# EAGLE board MultiWiiChassisv1.2_hex_power (EAGLE 5.11)
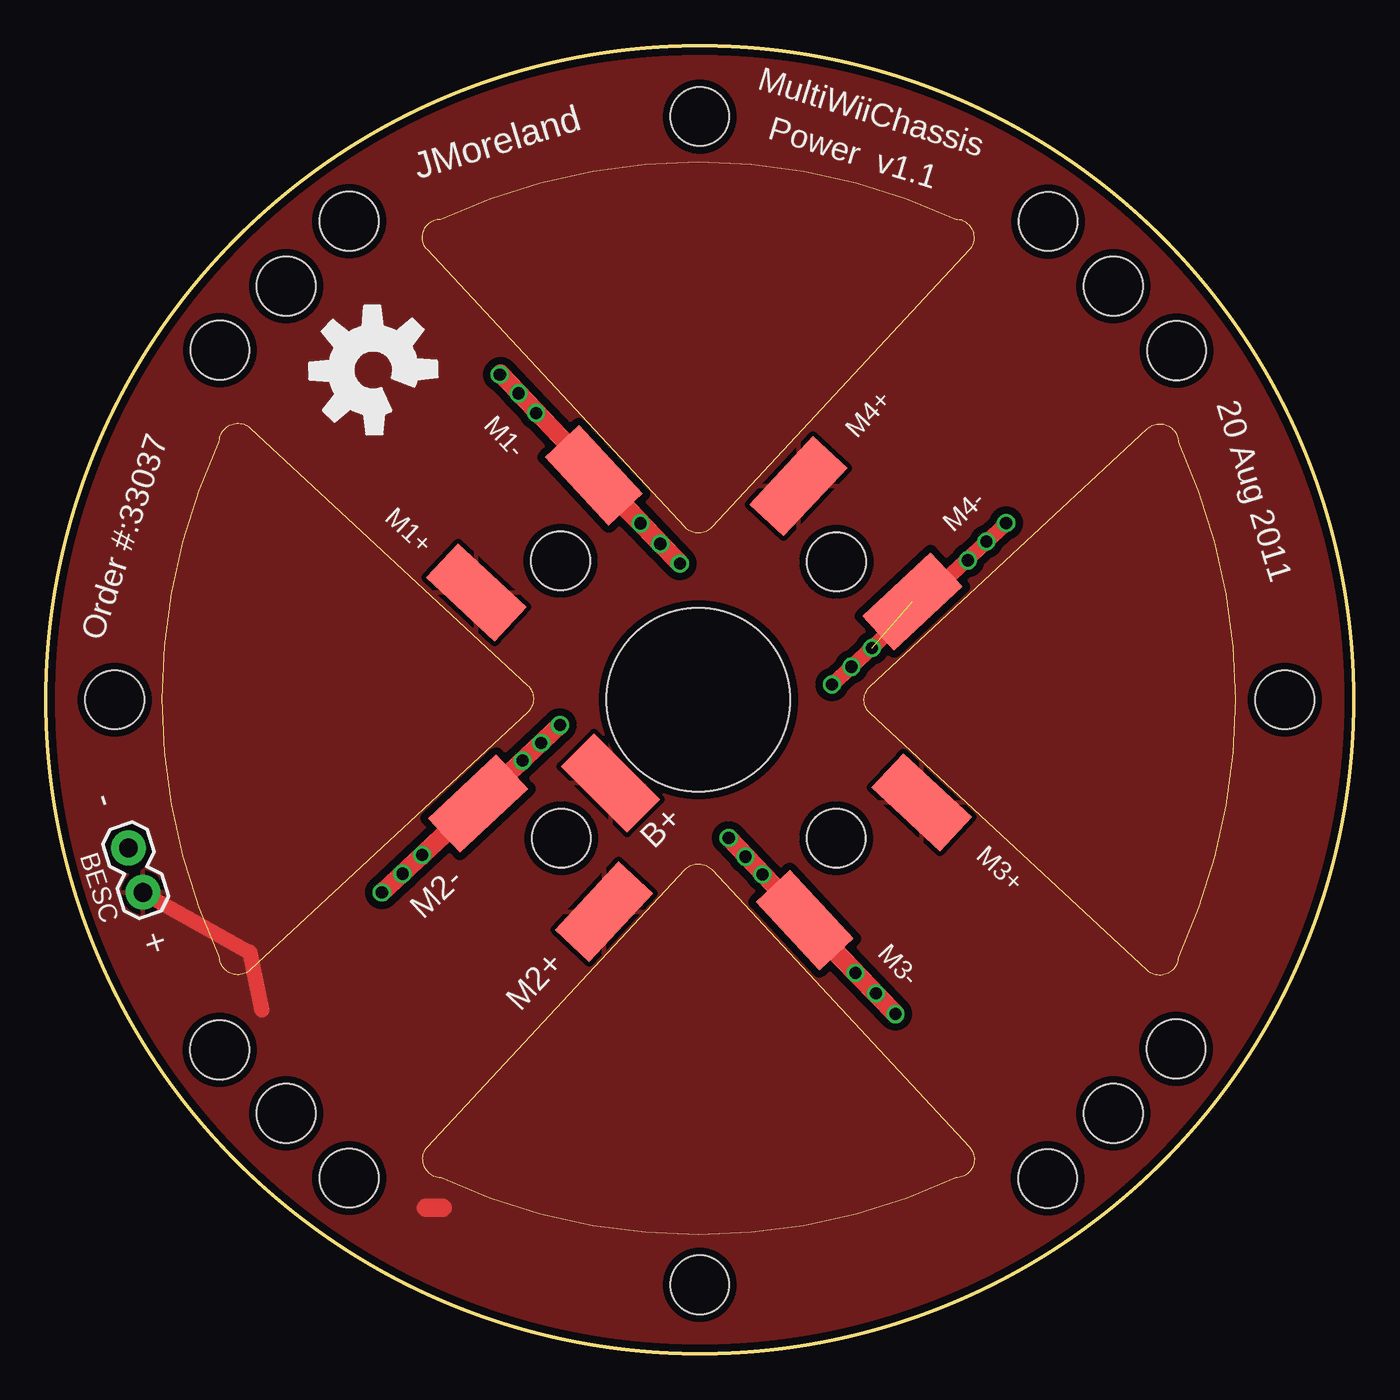
[diagram p0: board, top side]
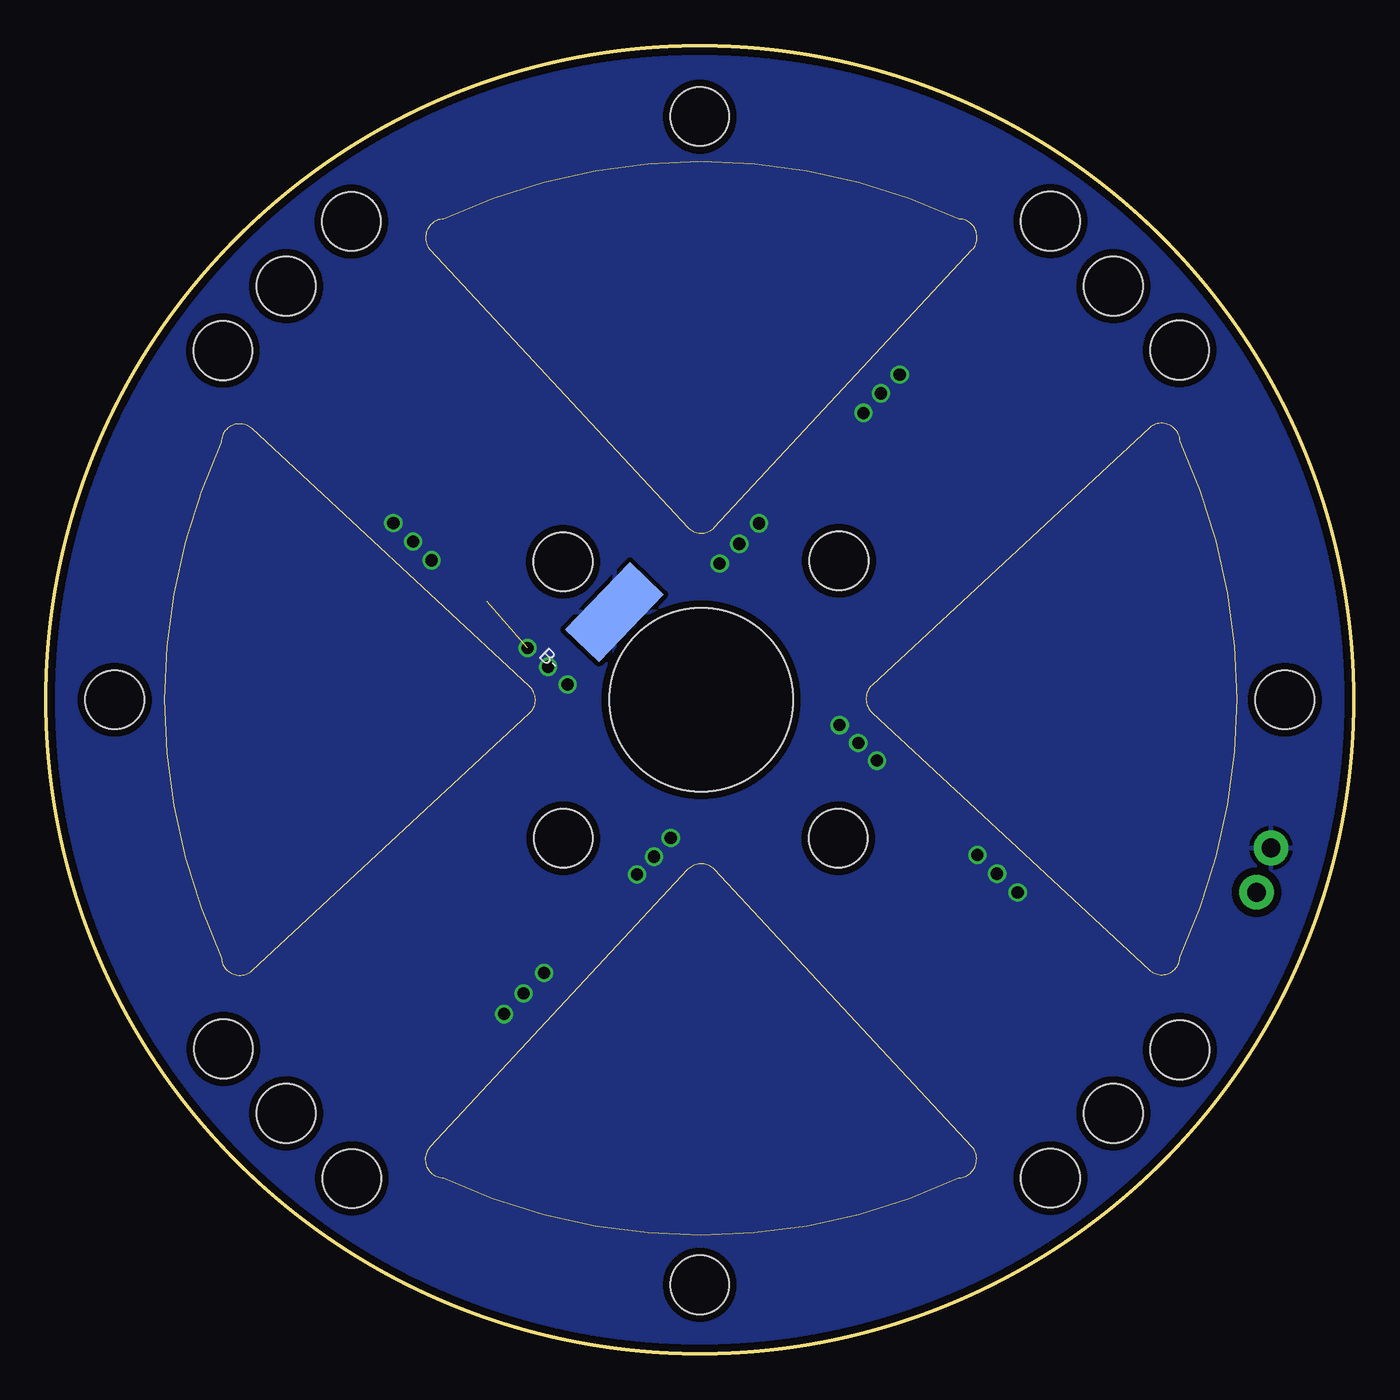
[diagram p1: board, bottom side, seen from below]

Size 71.12 x 71.12 mm. Coordinates in mm from the lower left corner, seen from the top.
Outline: circle at 35.56,35.56 radius 35.56
Copper layers (1*16): Top 0.035mm / dielectric 1.5mm / Bottom 0.035mm
Design rules "Fusion_eagle_rule_v1.1": minimum track width 6mil, minimum drill 12mil, track to track 6mil, track to pad 6mil, pad to pad 6mil, via to via 6mil, smd to smd 0mil, copper to edge 10mil, drill to drill 10mil, minimum pad ring 10mil, minimum via ring 6mil, stop-mask expansion 2mil, vias tented up to drill 100mil, thermal gap 10mil
Holes 3.2 mm at 35.56,67.28 67.38,35.56 35.56,3.74 3.74,35.56 13.06,13.06 13.06,58.06 58.06,58.06 58.06,13.06 9.46,54.58 16.49,61.59 54.5,61.57 61.49,54.55 61.47,16.57 54.48,9.52 16.49,9.55 9.45,16.52 28.03,28.03 27.99,43.12 42.99,43.06 42.98,28.03
Holes 10 mm at 35.48,35.56
vRestrict: 3 lines
Milling: area 20.5,6.5 to 50.5,26.6; area 6.3,20.6 to 26.5,50.6; area 20.5,44.6 to 50.5,64.8; area 44.5,20.6 to 64.7,50.6

## Footprints (pad centres in the part's own frame; a part is rotated, then mirrored left to right if it is on the bottom)
SOLDER_PAD_2X1 = smd 5.08 x 2.54: SPAD 0,0
1X02 = drill 1.016 pad 1.88 round: 1 0,0; 2 2.54,0

## Placement (x,y rotation side)
B+  SOLDER_PAD2X1  [SOLDER_PAD_2X1]  30.7,31.03 315 top
B-  SOLDER_PAD2X1  [SOLDER_PAD_2X1]  40.2,40.33 46 bottom
BESC  0  [1X02]  4.49,27.5 288 top
M1+  SOLDER_PAD2X1  [SOLDER_PAD_2X1]  23.41,41.4 137 top
M1-  SOLDER_PAD2X1  [SOLDER_PAD_2X1]  29.8,47.76 133 top
M2+  SOLDER_PAD2X1  [SOLDER_PAD_2X1]  30.35,24.03 47 top
M2-  SOLDER_PAD2X1  [SOLDER_PAD_2X1]  23.5,29.92 43 top
M3+  SOLDER_PAD2X1  [SOLDER_PAD_2X1]  47.63,29.98 137 top
M3-  SOLDER_PAD2X1  [SOLDER_PAD_2X1]  41.27,23.57 133 top
M4+  SOLDER_PAD2X1  [SOLDER_PAD_2X1]  40.92,47.18 227 top
M4-  SOLDER_PAD2X1  [SOLDER_PAD_2X1]  47.13,40.91 223 top
U$1  [OSHW-LOGO-L]  17.8,53.49 46 top

## Library data of the parts
B+ B- M1+ M1- M2+ M2- M3+ M3- M4+ M4- = JCM
BESC U$1 = SparkFun

## Nets
GND: B-.SPAD BESC.1 M1-.SPAD M2-.SPAD M3-.SPAD M4-.SPAD
VCC: B+.SPAD BESC.2 M1+.SPAD M2+.SPAD M3+.SPAD M4+.SPAD

## Tracks (layer width: path | path; a pad name or v marks a point on that pad's centre or on a via)
GND  (via drill 0.66 pad 0.81)  (1 unrouted)
  Top 0.813: v42.75,36.39 52.2,45.11
  Top 1.016: 24.71,53.29 v34.48,42.98 M1-.SPAD | v27.95,34.18 18.28,25.07 M2-.SPAD | v37.14,28.04 v46.21,18.48 M3-.SPAD
  other vias: 18.27,25.08 52.22,45.17 24.68,53.24 25.7,52.23 26.66,51.16 33.41,44.04 32.34,45.16 43.82,37.35 44.93,38.37 51.16,44.16 50.14,43.14 38.05,27.02 38.97,26.06 45.14,19.58 44.02,20.7 19.39,26.1 20.46,27.11 26.94,33.21 25.92,32.25
  pour Bottom (isolate 0.406): -2.52,73.76 73.68,73.76 73.58,-2.54 -2.62,-2.54
VCC
  Top 0.813: BESC.2 11.08,21.82 11.73,18.67
  Top 1.016: 21.57,7.92 20.68,7.92
  pour Top (isolate 0.406): 73.68,73.76 73.58,-2.54 -2.62,-2.54 -2.52,73.76

## Text on the board
tPlace: MultiWiiChassis | Power v1.1 | JMoreland | 20 Aug 2011 | Order #:33037 | - | +